# Altium PCB rp-fly.PcbDoc
Units mm, origin at the board's own origin, x right, y up, seen from the top; angles counter-clockwise.
Board outline 37 x 37 mm, 4 copper layers (Top Layer, GND, PWR, Bottom Layer), stack 0.651 mm thick; 29 components, 24 nets, 148 pads, 20 vias.
Unrouted connection lines stored in the file: 50.
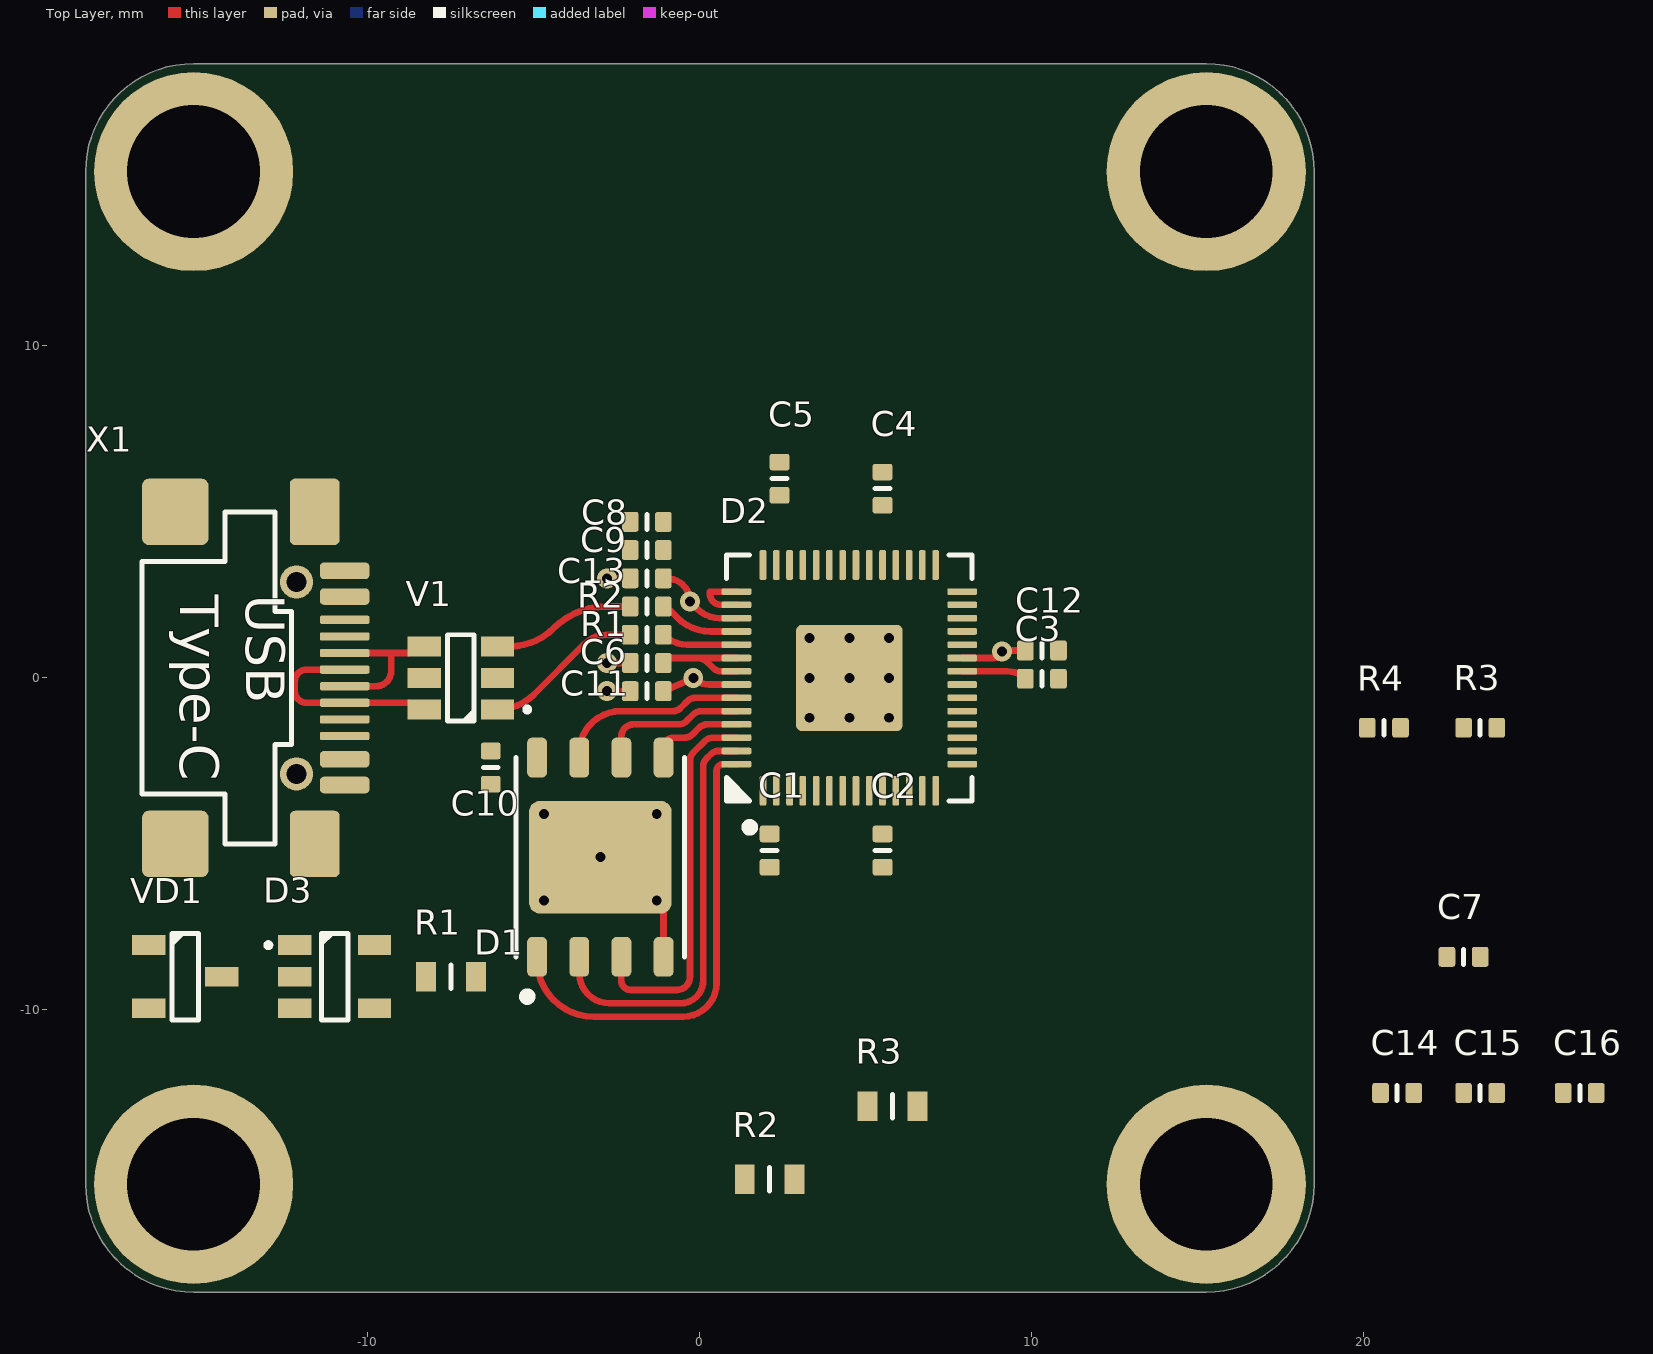
[diagram p0: Top Layer view]
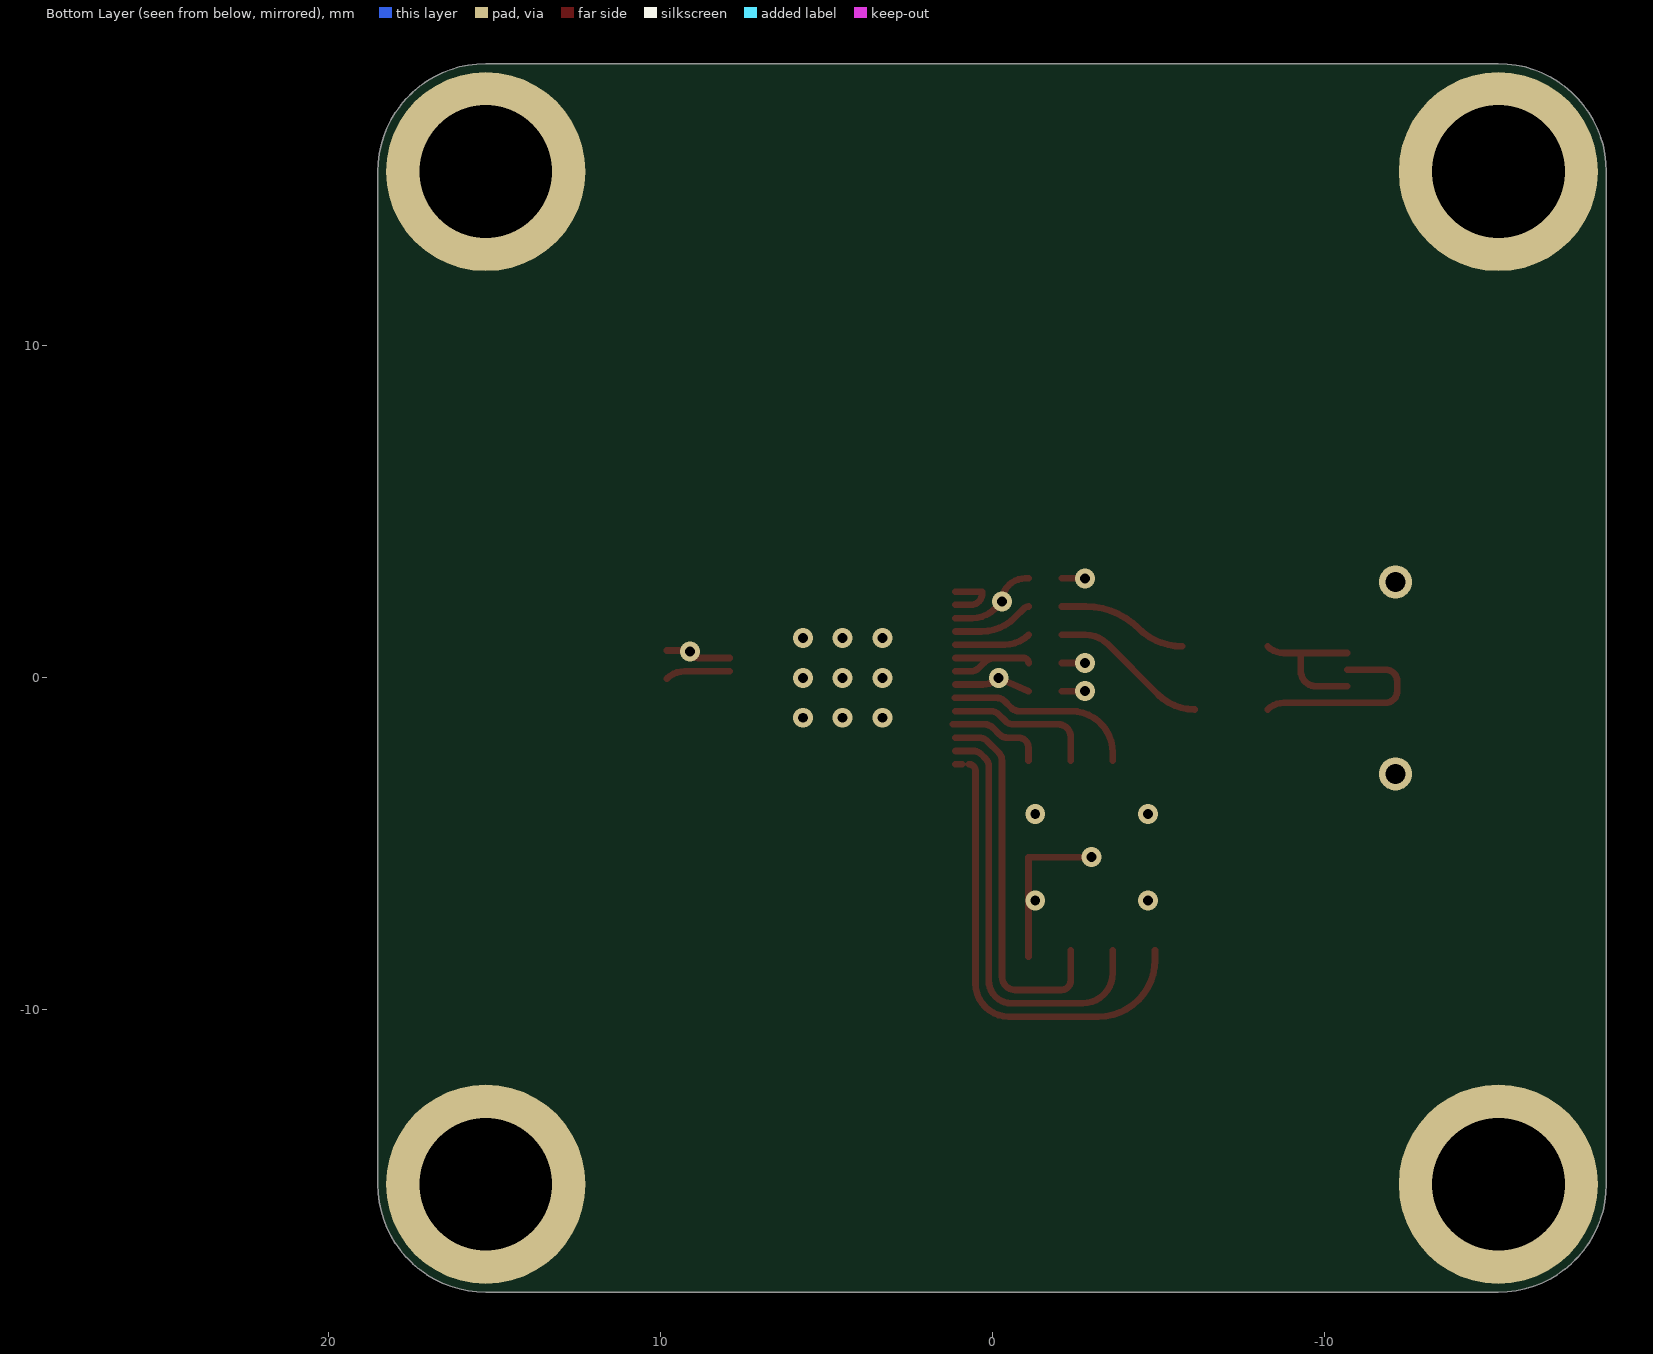
[diagram p1: Bottom Layer view, seen from below]
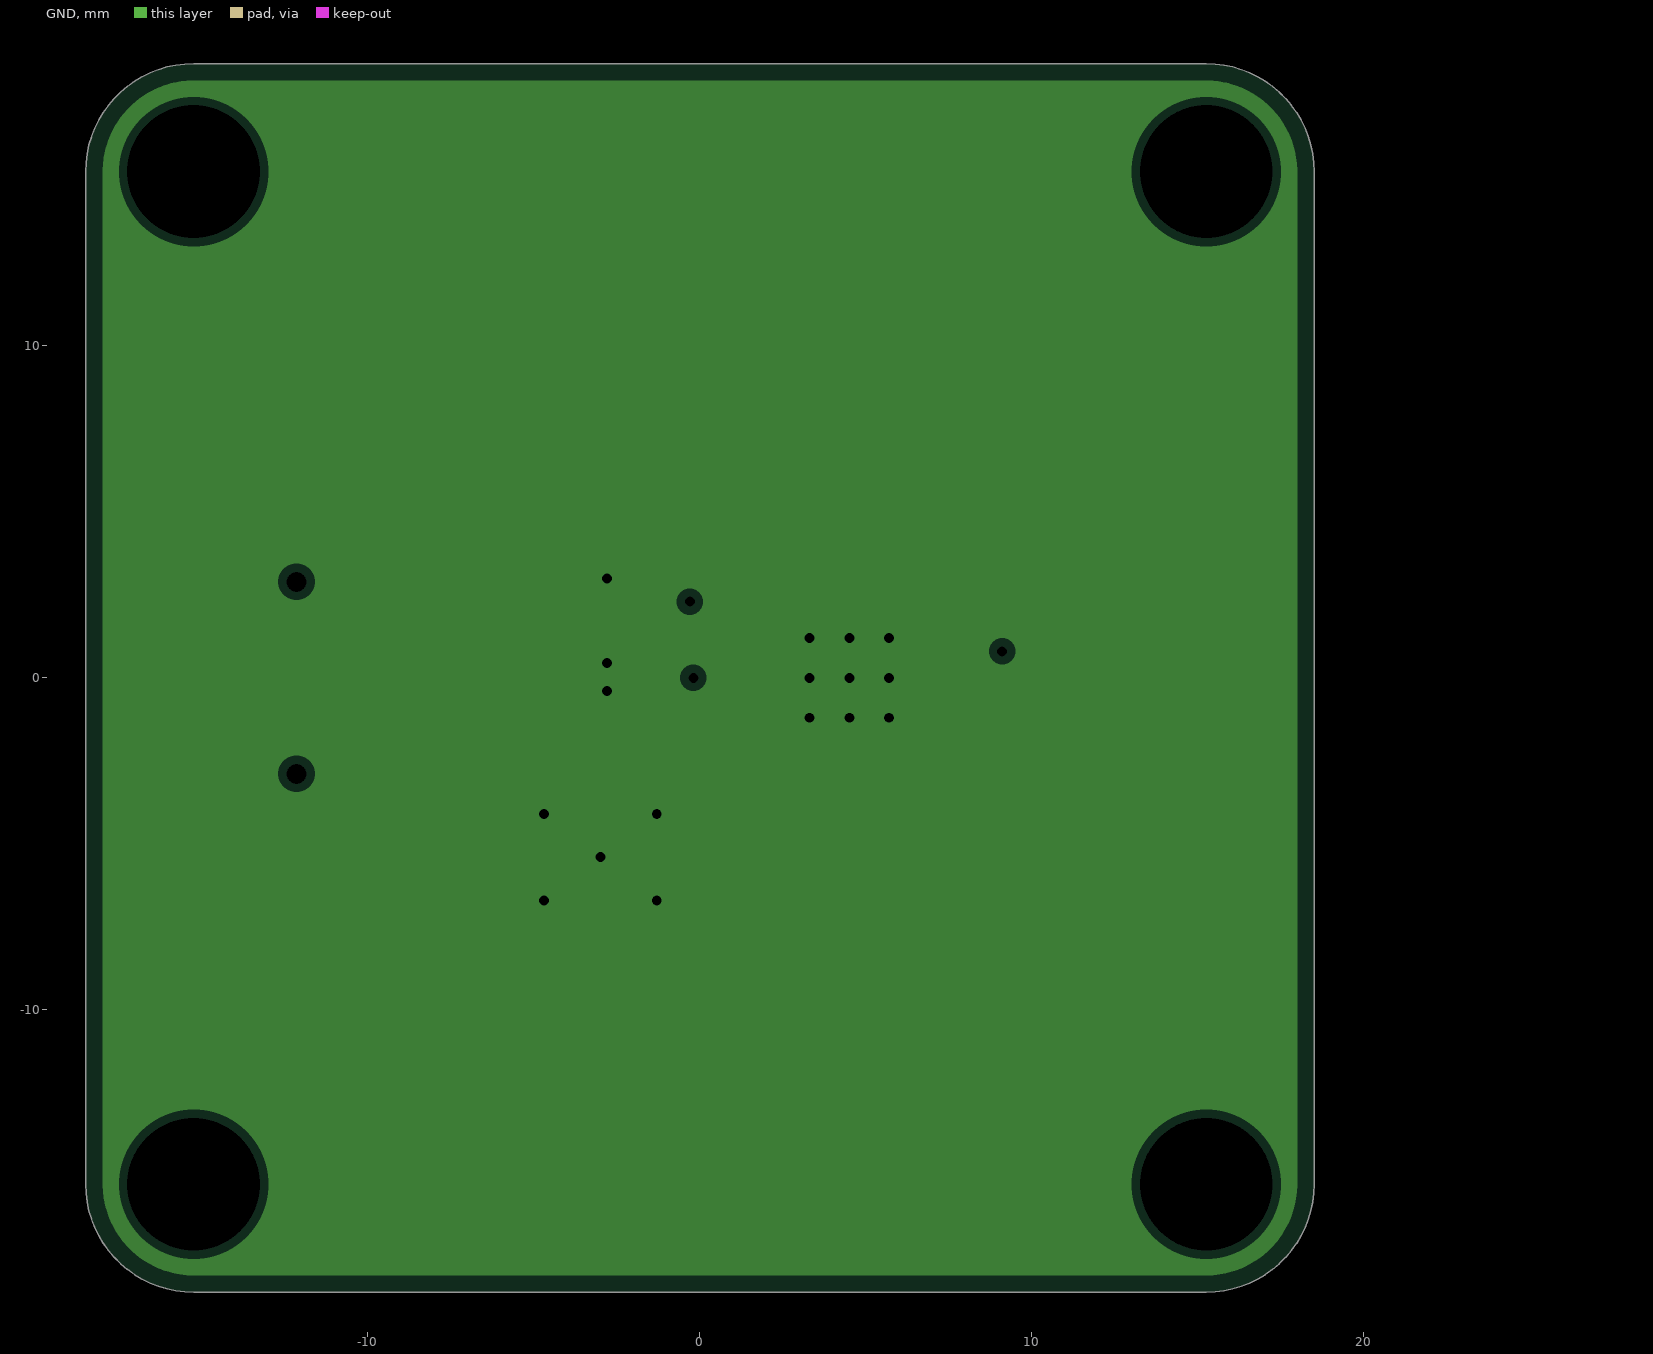
[diagram p2: GND, clearances drawn from the general rule]
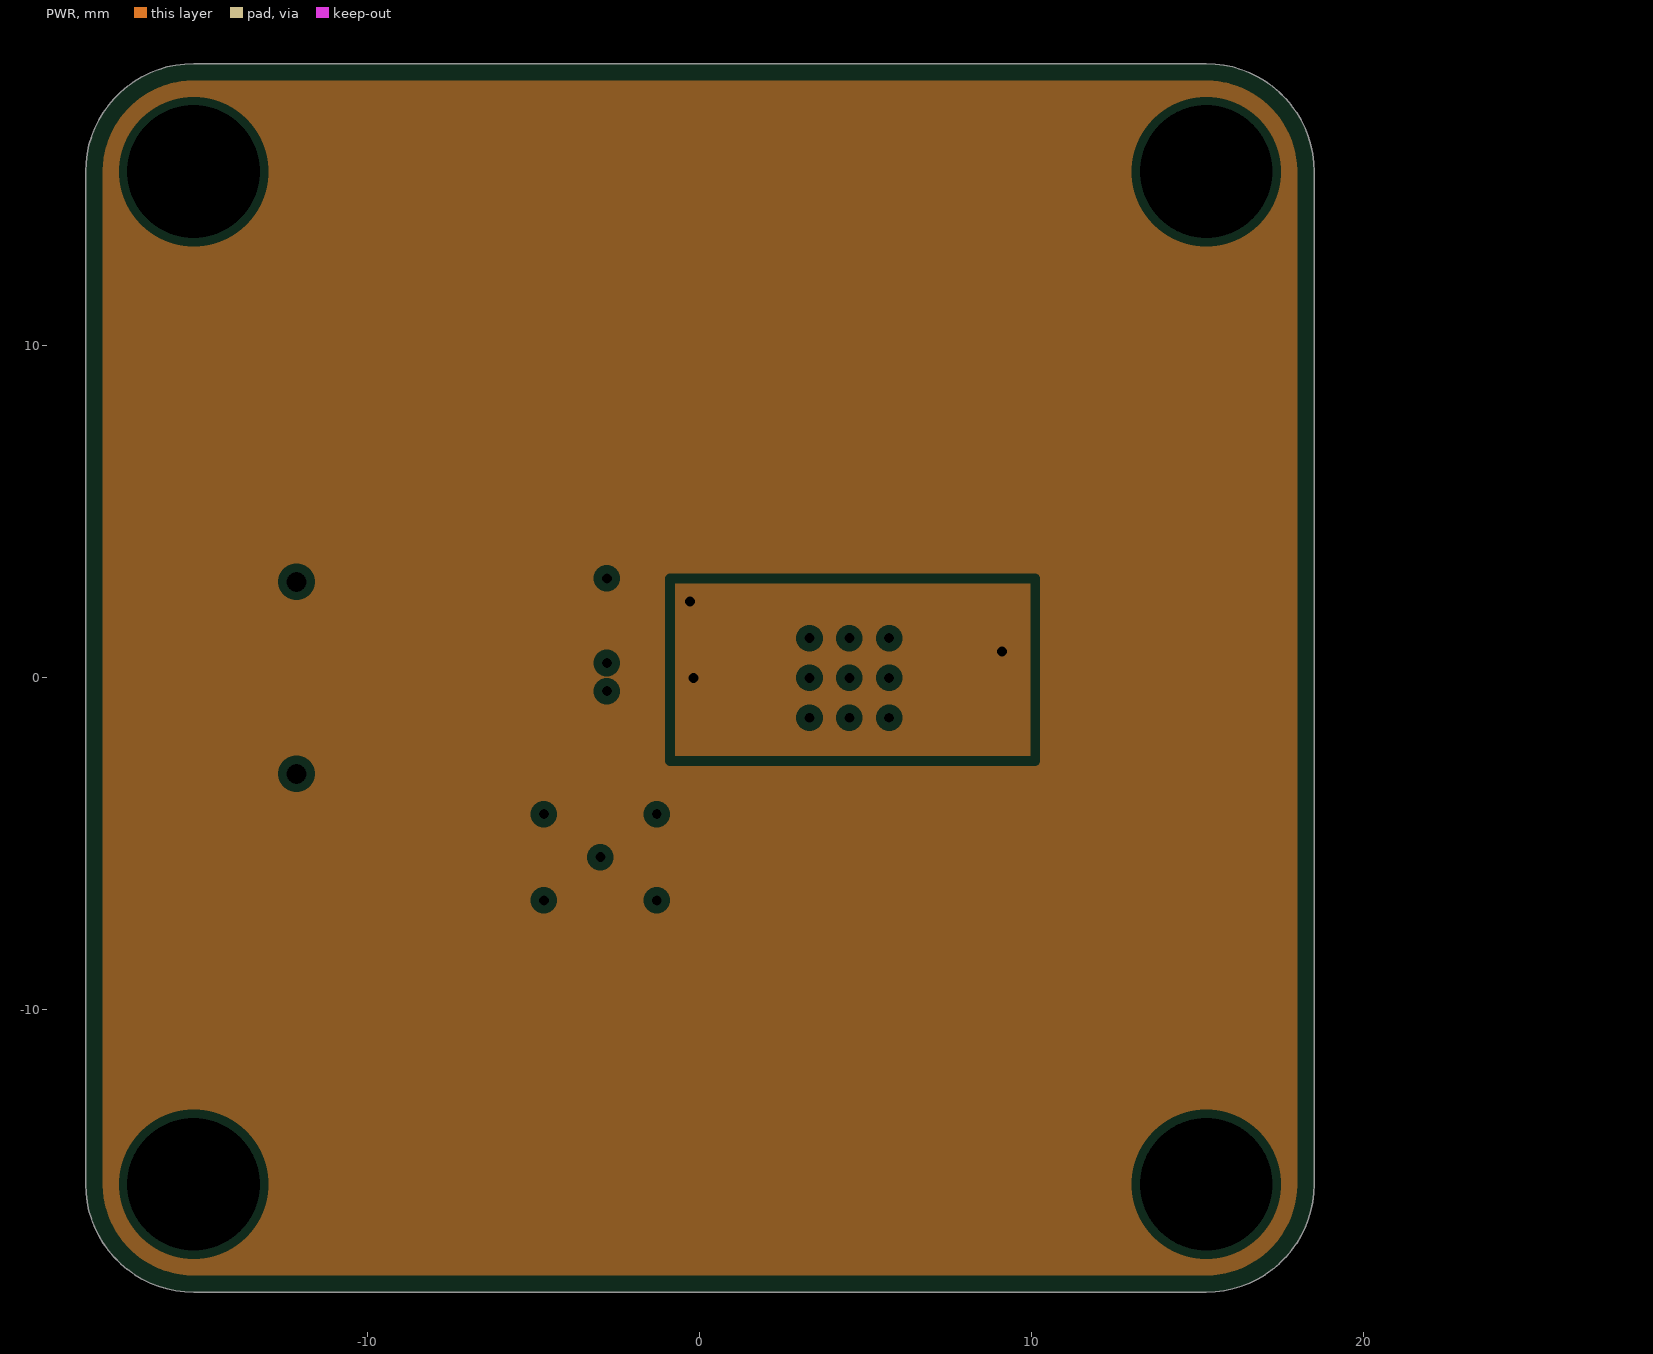
[diagram p3: PWR, clearances drawn from the general rule]

## Layer stack, top to bottom
Top Solder: solder mask 0.0102, Solder Resist, Dk 3.5
Top Layer: signal copper 0.0356
Dielectric 1: prepreg 0.127, FR-4, Dk 4.2
GND: plane copper 0.036, net GND
Dielectric 3: core 0.254, Dk 4.2
PWR: plane copper 0.036, net (Multiple Nets)
Dielectric 2: prepreg 0.127, Dk 4.2
Bottom Layer: signal copper 0.0356
Bottom Solder: solder mask 0.0102, Solder Resist, Dk 3.5

## Board outline
-18.5,-15.25 ccw(c-15.25,-15.25) -15.25,-18.5 15.25,-18.5 ccw(c15.25,-15.25) 18.5,-15.25 18.5,15.25 ccw(c15.25,15.25) 15.25,18.5 -15.25,18.5 ccw(c-15.25,15.25) -18.5,15.25

## Design rules (kind name [scope] priority, off if disabled: settings)
BoardOutlineClearance [All] p1: gap=0.25 ignorepadtopadclearanceinfootprint=FALSE
Clearance [All] p1: gap=0.2 ignorepadtopadclearanceinfootprint=FALSE
HoleSize [All] p1: absolutevalues=TRUE maxlimit=5 minlimit=0.3 maxpercent=80.000 minpercent=20.000
HoleToHoleClearance [All] p1: gap=0.2 allowstackedmicrovias=TRUE
MinimumAnnularRing all [All] p1: minimumring=0.15
MinimumAnnularRing pad [(InPadClass('All Pads'))] p2: minimumring=0.2
MinimumSolderMaskSliver [All] p1: minsoldermaskwidth=0.15
PlaneClearance [All] p1: clearance=0.25
PlaneConnect [All] p1: planeconnectstyle=Direct reliefexpansion=0.508 reliefentries=4 reliefconductorwidth=0.254 reliefairgap=0.254
PolygonConnect [All] p1: connectstyle=Direct reliefconductorwidth=0.254 reliefentries=4 polygonreliefangle="90 Angle" airgapwidth=0.254
RoutingVias [All] p1: holewidth=0.3 width=0.6 viastyle="Through Hole" minholewidth=0.3 minwidth=0.6 maxholewidth=0.3 maxwidth=0.6
SilkToSilkClearance [All] p1: silktosilkclearance=0.1
SilkToSolderMaskClearance [IsPad] p1: minsilkscreentomaskgap=0.1 clearancetoexposedcopper=TRUE
SolderMaskExpansion [All] p1: expansion=0.05
Width [All] p1: maxlimit=2 minlimit=0.2 preferedwidth=0.2
23 further rules are at their usual default settings.

## Classes and differential pairs
component class #MCU: C1 C2 C3 C4 C5 C6 C7 C8 C9 C10 C11 C12 C13 D1 D2 R1 R2
component class #PWR: R1 R2 R3 VD1
component class #USB: R3 R4 V1 X1
component class #LDO: C14 C15 C16 D3

## Components (designator, comment, footprint, x,y, rotation, side; value= is the part's Value field where it differs from the comment)
C1 "cap" STD-0402 2.1,-5.2 r90 top value="0.1 мкФ"
C2 "cap" STD-0402 5.5,-5.2 r90 top value="0.1 мкФ"
C3 "cap" STD-0402 10.3,-0.025 r180 top value="0.1 мкФ"
C4 "cap" STD-0402 5.5,5.7 r270 top value="0.1 мкФ"
C5 "cap" STD-0402 2.4,6 r90 top value="0.1 мкФ"
C6 "cap" STD-0402 -1.6,0.45 r0 top value="0.1 мкФ"
C7 "cap" STD-0402 23,-8.4 r0 top value="22 мкФ"
C8 "cap" STD-0402 -1.6,4.7 r0 top value="0.1 мкФ"
C9 "cap" STD-0402 -1.6,3.85 r0 top value="1 мкФ"
C10 "cap" STD-0402 -6.3,-2.7 r90 top value="0.1 мкФ"
C11 "cap" STD-0402 -1.6,-0.4 r0 top value="0.1 мкФ"
C12 "cap" STD-0402 10.3,0.825 r180 top value="0.1 мкФ"
C13 "cap" STD-0402 -1.6,3 r0 top value="1 мкФ"
C14 "cap" STD-0402 21,-12.5 r0 top value="1 мкФ"
C15 "cap" STD-0402 23.5,-12.5 r0 top value="1 мкФ"
C16 "cap" STD-0402 26.5,-12.5 r0 top value="22 мкФ"
D1 "W25-QSPI" WSON-8 -3,-5.4 r0 top
D2 "RP2040" QFN-56 4.5,0 r0 top
D3 "NCP114ASN330T1G" TSOT-23-5 -11,-9 r270 top
R1 "res" STD-0402 -1.6,1.3 r0 top value="27 Ом"
R1 "RL0603FR-070R01L" 0603 -7.5,-9 r180 top value="0.01 м"
R2 "res" STD-0402 -1.6,2.15 r0 top value="27 Ом"
R2 "RL0603FR-070R01L" 0603 2.1,-15.1 r0 top value="0.01 м"
R3 "res" STD-0402 23.5,-1.5 r0 top value="4.7 кОм"
R3 "RL0603FR-070R01L" 0603 5.8,-12.9 r0 top value="0.01 м"
R4 "res" STD-0402 20.6,-1.5 r0 top value="4.7 кОм"
V1 "USBLC6-2SC6" SOT-23-6 -7.2,0 r90 top
VD1 "diode-2k" SOT-23-3 -15.5,-9 r270 top
X1 "USB Type-C 16pin" "USB Type-C" -15.8,0 r270 top locked

## Footprints (in the part's own frame and the unit in brackets; to place one, negate y for a bottom-side part, rotate by r counter-clockwise, add the part's x,y. Pads: shape width x height; smd on the part's side, far side on the other; paste and mask are expansions set on the pad)
0603 [mm] "0603"
  rect 0.6x0.9 smd: 1(-0.75,0) 2(0.75,0)
  silkscreen extent 0,-0.35 0,0.35, body extent -0.8,-0.41 0.8,0.41, height 0.8
QFN-56 [mm] "QFN-56-PAD, 7.0 x 7.0 x 0.9"
  rrect50% 0.2x0.9 smd: 1(-2.6,-3.4) 2(-2.2,-3.4) 3(-1.8,-3.4) 4(-1.4,-3.4) 5(-1,-3.4) 6(-0.6,-3.4) 7(-0.2,-3.4) 8(0.2,-3.4) 9(0.6,-3.4) 10(1,-3.4) 11(1.4,-3.4) 12(1.8,-3.4) 13(2.2,-3.4) 14(2.6,-3.4) 29(2.6,3.4) 30(2.2,3.4) 31(1.8,3.4) 32(1.4,3.4) 33(1,3.4) 34(0.6,3.4) 35(0.2,3.4) 36(-0.2,3.4) 37(-0.6,3.4) 38(-1,3.4) 39(-1.4,3.4) 40(-1.8,3.4) 41(-2.2,3.4) 42(-2.6,3.4)
  rrect50% 0.9x0.2 smd: 15(3.4,-2.6) 16(3.4,-2.2) 17(3.4,-1.8) 18(3.4,-1.4) 19(3.4,-1) 20(3.4,-0.6) 21(3.4,-0.2) 22(3.4,0.2) 23(3.4,0.6) 24(3.4,1) 25(3.4,1.4) 26(3.4,1.8) 27(3.4,2.2) 28(3.4,2.6) 43(-3.4,2.6) 44(-3.4,2.2) 45(-3.4,1.8) 46(-3.4,1.4) 47(-3.4,1) 48(-3.4,0.6) 49(-3.4,0.2) 50(-3.4,-0.2) 51(-3.4,-0.6) 52(-3.4,-1) 53(-3.4,-1.4) 54(-3.4,-1.8) 55(-3.4,-2.2) 56(-3.4,-2.6)
  rrect10% 3.2x3.2 smd paste-3: PAD(0,0)
  silkscreen extent -3.7,-4.6 3.7,3.7, body extent -3.5,-3.5 3.5,3.5, height 0.8
SOT-23-3 [mm]
  rect 0.6x1 smd: 1(-0.95,-1.1) 2(0.95,-1.1) 3(0,1.1)
  silkscreen extent -1.3,-0.4 1.3,0.4, body extent -1.45,-1.18 1.45,1.19, height 1
SOT-23-6 [mm] "Стандартный, JEDEC MO-178. Универсальный - использовать для всех."
  rect 0.6x1 smd: 1(-0.95,-1.1) 2(0,-1.1) 3(0.95,-1.1) 4(0.95,1.1) 5(0,1.1) 6(-0.95,1.1)
  silkscreen extent -1.3,-2.07 1.3,0.4, body extent -1.4,-1.2 1.4,1.23, height 1.09
STD-0402 [mm]
  rrect30% 0.5x0.6 smd: 1(-0.5,0) 2(0.5,0)
  silkscreen extent 0,-0.23 0,0.23, body extent -0.5,-0.25 0.5,0.25, height 0.5
TSOT-23-5 [mm]
  rect 0.6x1 smd: 1(-0.95,-1.2) 2(0,-1.2) 3(0.95,-1.2) 4(0.95,1.2) 5(-0.95,1.2)
  silkscreen extent -1.3,-2.07 1.3,0.4, body extent -1.45,-1.6 1.45,1.6, height 0.94
"USB Type-C" [mm] "USB Type-C, Aliexpress"
  round 1 hole 0.6: 0(-2.89,3.65) 0(2.89,3.65)
  rrect50% 0.5x1.5 smd: A1/B12(-3.225,5.1) A4/B9(-2.45,5.1) A12/B1(3.225,5.1) B4/A9(2.45,5.1)
  rrect50% 0.25x1.5 smd: A5(-1.25,5.1) A6(-0.25,5.1) A7(0.25,5.1) A8(1.25,5.1) B5(1.75,5.1) B6(0.75,5.1) B7(-0.75,5.1) B8(-1.75,5.1)
  rrect20% 2x1.5 smd: SHIELD(-5,4.2) SHIELD(5,4.2)
  rrect20% 2x2 smd: SHIELD(-5,0) SHIELD(5,0)
  silkscreen extent -5,-1 5,3.5, body extent -5.7,-2.68 5.7,5.03, height 3.15
WSON-8 [mm] "WSON-8, 6.0 x 5.0 x 0.8"
  rrect50% 0.6x1.2 smd: 1(-1.905,-3) 2(-0.635,-3) 3(0.635,-3) 4(1.905,-3) 5(1.905,3) 6(0.635,3) 7(-0.635,3) 8(-1.905,3)
  rrect20% 4.3x3.4 smd paste-2: PAD(0,0)
  silkscreen extent -2.54,-4.3 2.54,3, body extent -2.5,-3 2.5,3, height 0.7

## Part data
C1 C2 C3 C4 C5 C6 C8 C10 C11 C12: library part C0402-0u1-50v-10%-X7R, "Конденсатор", Part Number=C0402-0u1-50v-10%-X7R
C7 C16: library part C0402-22u-6.3v-10%-X5R, "Конденсатор", Part Number=C0402-22u-6.3v-10%-X5R
C9 C13 C14 C15: library part C0402-1u-16v-10%-X7R, "Конденсатор", Part Number=C0402-1u-16v-10%-X7R
D1: library part W25Q128JVPIQ, "Flash память 16 МБайт", Part Number=W25Q128JVPIQ
D2: "Микроконтроллер", Part Number=RP2040
D3: library part CMP-0659-A.1, "Регулятор напряжения линейный, LDO, 3.3 В, 300 мА", Manufacturer=onsemi, Temperature="-40 - 85°C"
R1 R2: library part R0402-27r-1%-1/16W, "Резистор", Part Number=R0402-27r-1%-1/16W
R1 R2 R3: library part CMP-0663-A.1, "Резистор, 10 мОм, 0.1 Вт, точность 1%, 0603", Accuracy="1 %", Cat=Resistors, CreatedAt="22/02/2018 09:09:32 AM", FootprintDescription1="Нестандартный (см. IPC-SM-782).", FootprintName1=0402, FootprintRevisionID1=PCC-0009-A.3, LatestRevision=1, ReleaseDateNum=43153,3817254514
R3 R4: library part R0402-4k7-1%-1/16W, "Резистор", Part Number=R0402-4k7-1%-1/16W
V1: library part CMP-0703-A.2, "ESD защита, 3.5 пФ, 150 нА, USB", Manufacturer="ST Microelectronics", Temperature="-40 - 150°C"
VD1: library part PMEG2005CT.215, "Диод сдвоенный", Part Number=PMEG2005CT.215
X1: library part "USB Type-C 16 pin ALI", "USB Type-C", Part Number="USB Type-C 16 pin ALI"

## Free pads (board coordinates)
  round 6 hole 4: PAD(-15.25,-15.25) PAD(-15.25,15.25) PAD(15.25,-15.25) PAD(15.25,15.25)

## Via types
v1: diameter 0.6, hole 0.3, Top Layer to Bottom Layer, tented both sides, 20 vias

## Nets (pads, with @x,y where several pads share a name; then routed paths per layer and width w, separated by ;. In a path a pad name is that pad's centre, name@x,y a point inside that pad or via, vN(x,y) a via of type N, cw(c..) or ccw(c..) an arc to the next point about the centre after c; other vN are vias at no path point)
1V1: C11.2 C12.2 C13.2 D2.23 D2.45 D2.50 | length 7.1
  Top Layer w0.2: C11.2 v1(-0.2,0) ccw(c0.283,0.483) 0.283,-0.2 D2.50 ; C13.2 -1,3 cw(c-1,2.3) v1(-0.3,2.3) -0.083,2.083 ccw(c0.6,2.766) 0.6,1.8 D2.45 ; D2.23 8.859,0.6 ccw(c8.859,0.941) 9.1,0.7 cw(c9.402,0.398) 9.402,0.825 C12.2
  other v1: 9.1,0.8
3V3: C1.2 C2.2 C3.2 C4.2 C5.2 C6.2 C7.2 C8.2 C9.2 C10.2 D1.8 D2.1 D2.10 D2.22 D2.33 D2.42 D2.43 D2.44 D2.48 D2.49 R1.2@-8.25,-9 | length 7.4
  Top Layer w0.2: C6.2 cw(c-0.95,0.45) -0.95,0.6 -0.1,0.6 ; D2.49 0.641,0.2 cw(c0.641,0.541) 0.4,0.3 0.241,0.459 ccw(c-0.1,0.117) -0.1,0.6 ; D2.48 -0.1,0.6 ; D2.44 0.641,2.2 cw(c0.641,2.541) 0.3,2.541 0.3,2.6 D2.43 ; D2.22 9.257,0.2 cw(c9.257,-0.568) C3.2
3V3+: C15.2 C16.2 D3.5 R1.1@-6.75,-9
5V0: R2.2@2.85,-15.1
5V0+: R2.1@1.35,-15.1 VD1.2
9V0: R3.2@6.55,-12.9
9V0+: R3.1@5.05,-12.9
GND: C1.1 C2.1 C3.1 C4.1 C5.1 C6.1 C7.1 C8.1 C9.1 C10.1 C11.1 C12.1 C13.1 C14.1 C15.1 C16.1 D1.4 D1.PAD D2.19 D2.PAD D3.2 R3.2@24,-1.5 R4.2 V1.2 X1.A1/B12 X1.A12/B1 | length 7
  Top Layer w0.2: v1(-3,-5.4) -1.095,-5.4 D1.4 ; v1(-2.8,-0.4) C11.1 ; v1(-2.8,0.45) C6.1 ; v1(-2.8,3) C13.1
  other v1: -4.7,-6.7 -1.3,-6.7 -4.7,-4.1 -1.3,-4.1 3.3,-1.2 4.5,-1.2 5.7,-1.2 3.3,0 4.5,0 5.7,0 3.3,1.2 4.5,1.2 5.7,1.2
NetC14_2: C14.2 D3.1 D3.3 VD1.3
NetD2_46: D2.46 R2.2@-1.1,2.15 | length 2.4
  Top Layer w0.2: R2.2@-1.1,2.15 cw(c-1.1,1.956) -0.963,2.093 -0.685,1.815 ccw(c0.317,2.817) 0.317,1.4 D2.46
NetD2_47: D2.47 R1.2@-1.1,1.3 | length 2.3
  Top Layer w0.2: R1.2@-1.1,1.3 ccw(c-0.376,2.024) -0.376,1 D2.47
NetR3_1: R3.1@23,-1.5 X1.A5
NetR4_1: R4.1 X1.B5
NetV1_4: V1.4 X1.A7 X1.B7 | length 4.7
  Top Layer w0.2: X1.A7 -9.75,-0.25 ccw(c-9.75,0.2) -9.3,0.2 -9.3,0.75 ; X1.B7 -9.3,0.75 ; V1.4 cw(c-8.783,1.433) -8.783,0.75 -9.3,0.75
NetV1_6: V1.6 X1.A6 X1.B6 | length 6.2
  Top Layer w0.2: X1.A6 -11.85,0.25 ccw(c-11.85,-0.1) -12.2,-0.1 -12.2,-0.4 ccw(c-11.85,-0.4) -11.85,-0.75 X1.B6 -8.783,-0.75 cw(c-8.783,-1.433) V1.6
QSPI-CLK: D1.6 D2.52 | length 4.6
  Top Layer w0.2: D1.6@-2.365,-2.5 -2.365,-1.768 cw(c-1.997,-1.768) -1.997,-1.4 -0.641,-1.4 ccw(c-0.641,-1.059) -0.4,-1.3 -0.2,-1.1 cw(c0.041,-1.341) 0.041,-1 ; 0,-1 D2.52
QSPI-CSn: D1.1 D2.56 | length 14.2
  Top Layer w0.2: D1.1@-4.905,-8.2 -4.905,-8.498 ccw(c-3.203,-8.498) -3.203,-10.2 -0.5,-10.2 ccw(c-0.5,-9.2) 0.5,-9.2 0.5,-2.8 cw(c0.7,-2.8) D2.56@0.7,-2.6 ; D2.56@0.9,-2.6 D2.56
QSPI-IO0: D1.5 D2.53 | length 3
  Top Layer w0.2: D1.5@-1.095,-2.5 -1.095,-2.098 cw(c-0.797,-2.098) -0.797,-1.8 -0.466,-1.8 ccw(c-0.466,-1.459) -0.225,-1.7 -0.025,-1.5 cw(c0.216,-1.741) 0.216,-1.4 ; 0.175,-1.4 D2.53@1.175,-1.4
QSPI-IO1: D1.2 D2.55 | length 13
  Top Layer w0.2: D1.2@-3.635,-8.2 -3.635,-8.889 ccw(c-2.724,-8.889) -2.724,-9.8 -0.583,-9.8 ccw(c-0.583,-9.117) 0.1,-9.117 0.1,-2.7 ; 0.1,-2.666 cw(c0.441,-2.666) 0.2,-2.425 0.325,-2.3 cw(c0.566,-2.541) 0.566,-2.2 ; 0.525,-2.2 0.566,-2.2 ; D2.55 0.566,-2.2
QSPI-IO2: D1.3 D2.54 | length 11.7
  Top Layer w0.2: D1.3@-2.365,-8.2 -2.365,-9.121 ccw(c-2.086,-9.121) -2.086,-9.4 -0.7,-9.4 ccw(c-0.7,-9) -0.3,-9 -0.3,-2.491 cw(c0.041,-2.491) -0.2,-2.25 0.15,-1.9 cw(c0.391,-2.141) 0.391,-1.8 ; 0.35,-1.8 0.391,-1.8 ; D2.54 0.391,-1.8
QSPI-IO3: D1.7 D2.51 | length 5.9
  Top Layer w0.2: D1.7@-3.635,-2.5 -3.635,-2.253 cw(c-2.382,-2.253) -2.382,-1 -0.816,-1 ccw(c-0.816,-0.659) -0.575,-0.9 -0.375,-0.7 cw(c-0.134,-0.941) -0.134,-0.6 ; -0.175,-0.6 D2.51@1.125,-0.6
USB.D+: R1.1@-2.1,1.3 V1.1 | length 4.8
  Top Layer w0.2: V1.1 ccw(c-6.1,0.619) -4.99,-0.49 -3.483,1.017 cw(c-2.8,0.334) -2.8,1.3 R1.1@-2.1,1.3
USB.D-: R2.1@-2.1,2.15 V1.3 | length 3.9
  Top Layer w0.2: V1.3@-5.728,0.95 ccw(c-5.728,2.828) -4.4,1.5 cw(c-2.831,-0.069) -2.831,2.15 R2.1@-2.1,2.15
VUSB: V1.5 VD1.1 X1.A4/B9 X1.B4/A9
pads on no net: D2.2 D2.3 D2.4 D2.5 D2.6 D2.7 D2.8 D2.9 D2.11 D2.12 D2.13 D2.14 D2.15 D2.16 D2.17 D2.18 D2.20 D2.21 D2.24 D2.25 D2.26 D2.27 D2.28 D2.29 D2.30 D2.31 D2.32 D2.34 D2.35 D2.36 D2.37 D2.38 D2.39 D2.40 D2.41 D3.4 X1.0 X1.A8 X1.B8 X1.SHIELD

## Polygon pours and split planes (outlines as drawn)
GND on GND (split plane): 15.465,17.983 15.679,17.958 15.89,17.916 16.097,17.857 16.299,17.783 16.495,17.693 16.682,17.588 16.861,17.468 17.031,17.335 17.189,17.189 17.335,17.031 17.468,16.861 17.588,16.682 17.693,16.495 17.783,16.299 17.857,16.097 17.916,15.89 17.958,15.679 17.983,15.465 17.991,15.265 17.99,15.25 17.99,-15.25 17.991,-15.265 17.983,-15.465 17.958,-15.679 17.916,-15.89 17.857,-16.097 17.783,-16.299 17.693,-16.495 17.588,-16.682 17.468,-16.861 17.335,-17.031 17.189,-17.189 17.031,-17.335 16.861,-17.468 16.682,-17.588 16.495,-17.693 16.299,-17.783 16.097,-17.857 15.89,-17.916 15.679,-17.958 15.465,-17.983 15.265,-17.991 15.25,-17.99 -15.25,-17.99 -15.265,-17.991 -15.465,-17.983 -15.679,-17.958 -15.89,-17.916 -16.097,-17.857 -16.299,-17.783 -16.495,-17.693 -16.682,-17.588 -16.861,-17.468 -17.031,-17.335 -17.189,-17.189 -17.335,-17.031 -17.468,-16.861 -17.588,-16.682 -17.693,-16.495 -17.783,-16.299 -17.857,-16.097 -17.916,-15.89 -17.958,-15.679 -17.983,-15.465 -17.991,-15.265 -17.99,-15.25 -17.99,15.25 -17.991,15.265 -17.983,15.465 -17.958,15.679 -17.916,15.89 -17.857,16.097 -17.783,16.299 -17.693,16.495 -17.588,16.682 -17.468,16.861 -17.335,17.031 -17.189,17.189 -17.031,17.335 -16.861,17.468 -16.682,17.588 -16.495,17.693 -16.299,17.783 -16.097,17.857 -15.89,17.916 -15.679,17.958 -15.465,17.983 -15.265,17.991 -15.25,17.99 15.25,17.99 15.265,17.991
1V1 on PWR (split plane): 9.949,-2.349 -0.749,-2.349 -0.749,2.849 9.949,2.849
3V3 on PWR (split plane): 15.465,17.983 15.679,17.958 15.89,17.916 16.097,17.857 16.299,17.783 16.495,17.693 16.682,17.588 16.861,17.468 17.031,17.335 17.189,17.189 17.335,17.031 17.468,16.861 17.588,16.682 17.693,16.495 17.783,16.299 17.857,16.097 17.916,15.89 17.958,15.679 17.983,15.465 17.991,15.265 17.99,15.25 17.99,-15.25 17.991,-15.265 17.983,-15.465 17.958,-15.679 17.916,-15.89 17.857,-16.097 17.783,-16.299 17.693,-16.495 17.588,-16.682 17.468,-16.861 17.335,-17.031 17.189,-17.189 17.031,-17.335 16.861,-17.468 16.682,-17.588 16.495,-17.693 16.299,-17.783 16.097,-17.857 15.89,-17.916 15.679,-17.958 15.465,-17.983 15.265,-17.991 15.25,-17.99 -15.25,-17.99 -15.265,-17.991 -15.465,-17.983 -15.679,-17.958 -15.89,-17.916 -16.097,-17.857 -16.299,-17.783 -16.495,-17.693 -16.682,-17.588 -16.861,-17.468 -17.031,-17.335 -17.189,-17.189 -17.335,-17.031 -17.468,-16.861 -17.588,-16.682 -17.693,-16.495 -17.783,-16.299 -17.857,-16.097 -17.916,-15.89 -17.958,-15.679 -17.983,-15.465 -17.991,-15.265 -17.99,-15.25 -17.99,15.25 -17.991,15.265 -17.983,15.465 -17.958,15.679 -17.916,15.89 -17.857,16.097 -17.783,16.299 -17.693,16.495 -17.588,16.682 -17.468,16.861 -17.335,17.031 -17.189,17.189 -17.031,17.335 -16.861,17.468 -16.682,17.588 -16.495,17.693 -16.299,17.783 -16.097,17.857 -15.89,17.916 -15.679,17.958 -15.465,17.983 -15.265,17.991 -15.25,17.99 15.25,17.99 15.265,17.991

## Other copper
PWR (plane layer: these items are gaps in the copper):
  lines w0.3: -0.9,-2.5 -0.9,3 10.1,3 10.1,-2.5 -0.9,-2.5

## Silkscreen, mask and mechanical layers (free items; w line width, h text height)
Mechanical 1:
  lines w0.1: -12.5,-18.5 -12.175,-18.5 ; 15.25,-18.5 ccw(c15.25,-15.25) 18.5,-15.25 18.5,15.25 ccw(c15.25,15.25) 15.25,18.5 -15.25,18.5 ccw(c-15.25,15.25) -18.5,15.25 -18.5,-15.25 ccw(c-15.25,-15.25) -15.25,-18.5 15.25,-18.5 ; 15.25,-18.5 15.25,-18.5

## Text inside footprints (layer, text, board x,y; h text height)
X1: Top Overlay "USB / Type-C" at -16.05,2.5 h2 r270